# Altium PCB Switch.PcbDoc (part 1 of 2)
Units mm, origin at the board's own origin, x right, y up, seen from the top; angles counter-clockwise.
Board outline 170 x 46 mm, 4 copper layers (SIG, GND1, GND2, PWR/SIG), stack 1.564 mm thick; 45 components, 96 nets, 349 pads, 136 vias.
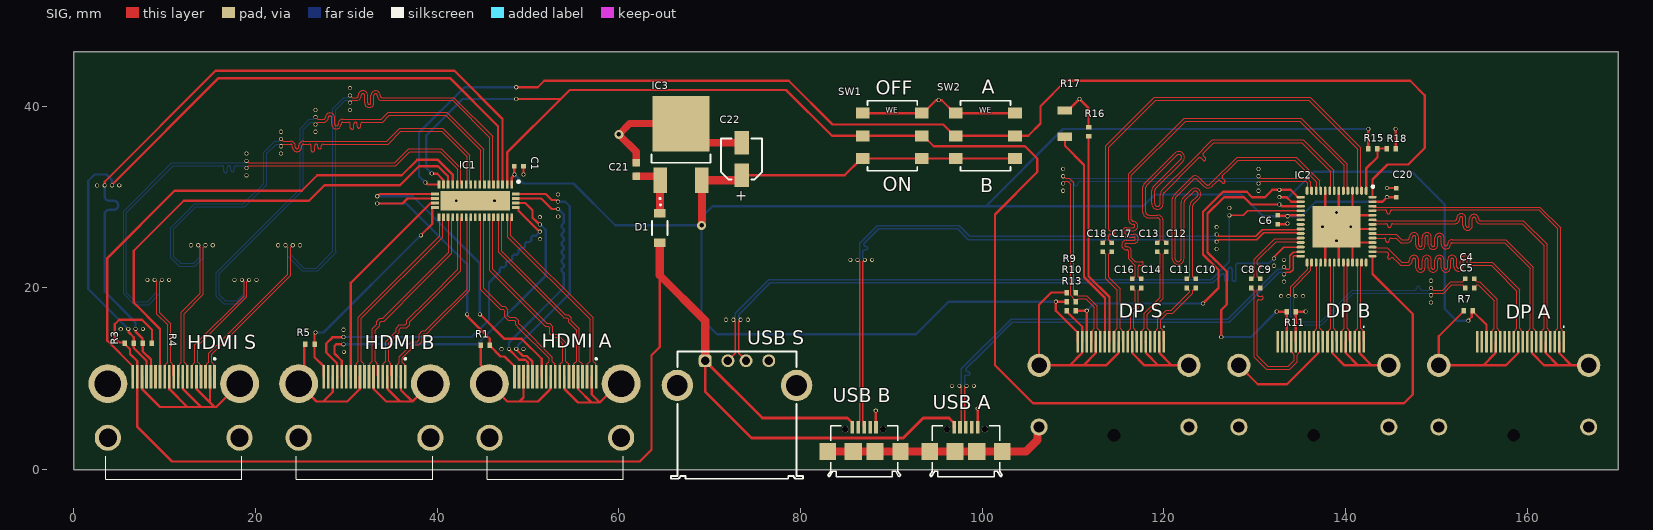
[diagram p0: SIG view]
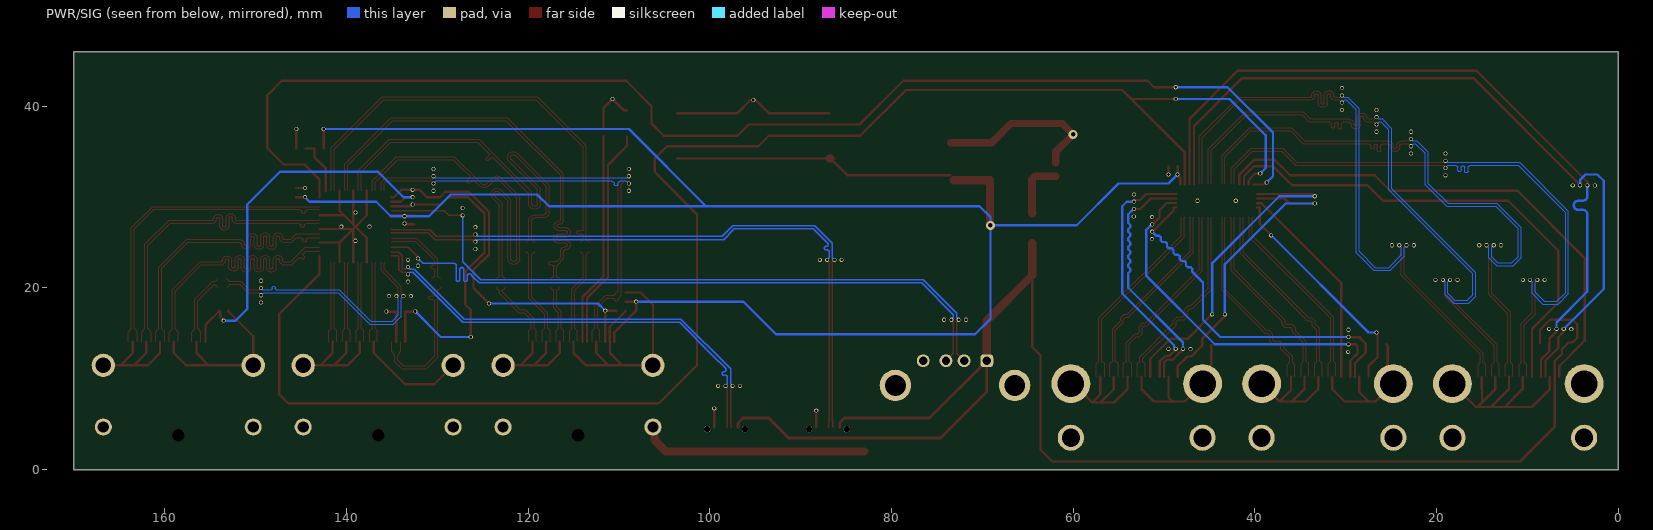
[diagram p1: PWR/SIG view, seen from below]
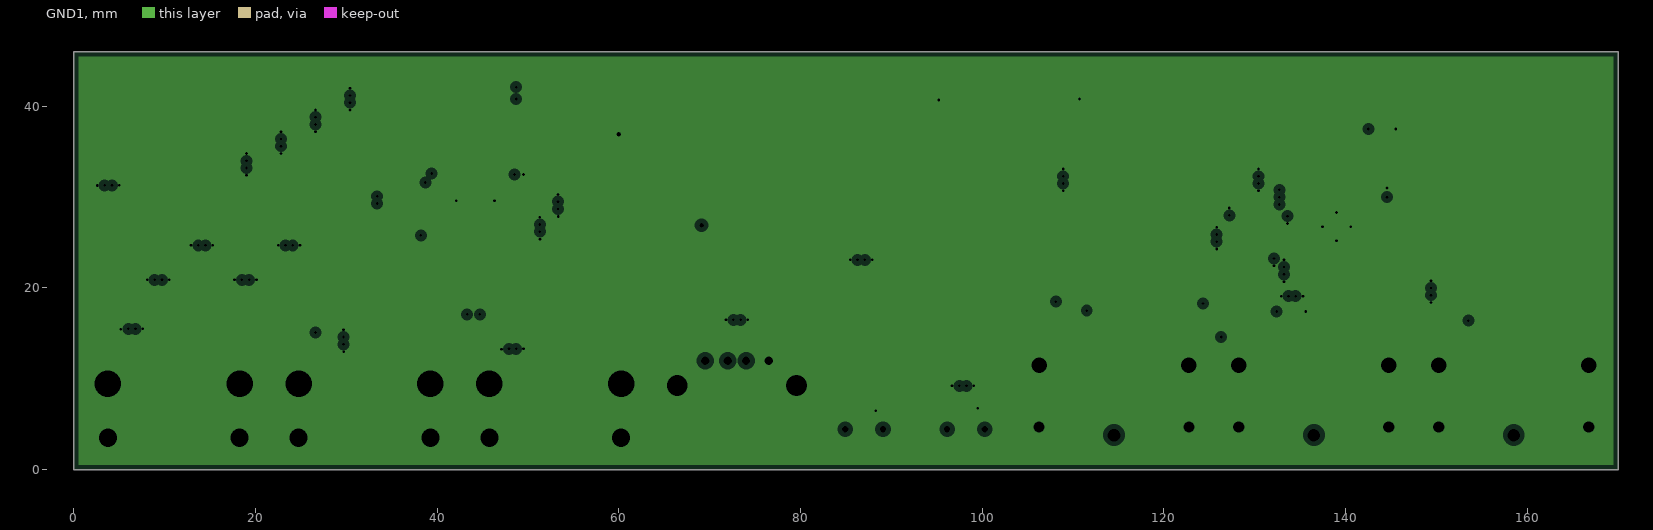
[diagram p2: GND1, clearances drawn from the general rule]
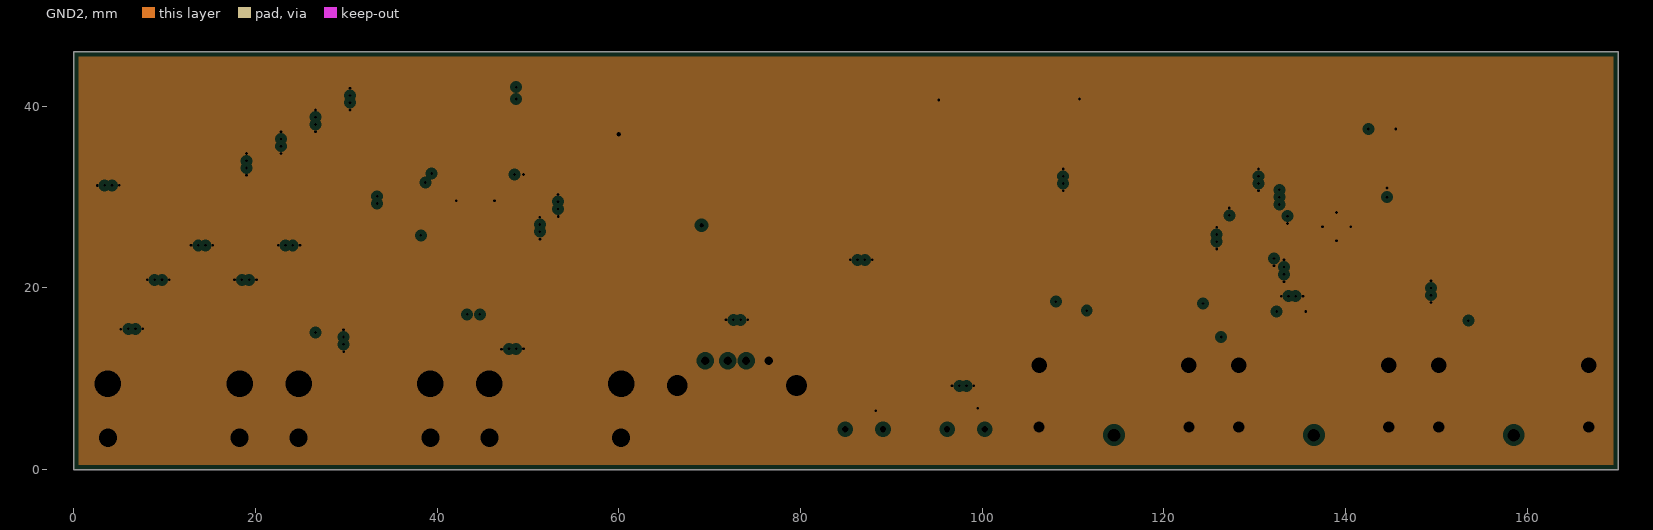
[diagram p3: GND2, clearances drawn from the general rule]

## Layer stack, top to bottom
Top Solder: solder mask 0.0102, Solder Resist, Dk 3.5
SIG: signal copper 0.035
Dielectric 2: prepreg 0.0994, PP-006, Dk 4.1
GND1: plane copper 0.0152, net GND
Dielectric 1: dielectric 1.265, FR-4, Dk 4.8
GND2: plane copper 0.0152, net GND
Dielectric 3: prepreg 0.0994, PP-006, Dk 4.1
PWR/SIG: signal copper 0.035
Bottom Solder: solder mask 0.0102, Solder Resist, Dk 3.5

## Board outline
0,0 0,46 170,46 170,0

## Design rules (kind name [scope] priority, off if disabled: settings)
Clearance [All] p1: gap=0.254 ignorepadtopadclearanceinfootprint=TRUE except(0.15: Arc-Arc Arc-Track Arc-SMDPad Track-Track Track-SMDPad)
DiffPairsRouting USB_DiffPairsRouting [InDifferentialPairClass('USB_Sink') Or InDifferentialPairClass('USB_B') Or InDifferentialPairClass('USB_A')] p1: maxlimit=0.203 minlimit=0.203 mostfreqgap=0.203 toplayer_minwidth=0.155 toplayer_maxwidth=0.155 toplayer_prefwidth=0.155 bottomlayer_minwidth=0.155 bottomlayer_maxwidth=0.155 bottomlayer_prefwidth=0.155 maxuncoupledlength=50
DiffPairsRouting VIDEO_DiffPairsRouting [InDifferentialPairClass('Z100')] p2: maxlimit=0.203 minlimit=0.203 mostfreqgap=0.203 toplayer_minwidth=0.122 toplayer_maxwidth=0.122 toplayer_prefwidth=0.122 bottomlayer_minwidth=0.122 bottomlayer_maxwidth=0.122 bottomlayer_prefwidth=0.122 maxuncoupledlength=8
DiffPairsRouting [All] p3: maxlimit=0.254 minlimit=0.254 mostfreqgap=0.254 toplayer_minwidth=0.381 toplayer_maxwidth=0.381 toplayer_prefwidth=0.381 bottomlayer_minwidth=0.381 bottomlayer_maxwidth=0.381 bottomlayer_prefwidth=0.381 maxuncoupledlength=12.7
HoleSize [All] p1: absolutevalues=TRUE maxlimit=3 minlimit=0.025 maxpercent=80.000 minpercent=20.000
MatchedLengths USB_MatchedLengths [InDifferentialPairClass('USB_Sink') Or InDifferentialPairClass('USB_B') Or InDifferentialPairClass('USB_A')] p1: tolerance=1 checknetsindiffpair=TRUE checkdiffpairvsdiffpair=FALSE checkxsignals=FALSE checkothers=FALSE
MatchedLengths VIDEO_MatchedLengths [InDifferentialPairClass('Z100')] p2: tolerance=1 checknetsindiffpair=TRUE checkdiffpairvsdiffpair=FALSE checkxsignals=FALSE checkothers=FALSE
MinimumSolderMaskSliver [All] p1: minsoldermaskwidth=0.1
PlaneClearance [All] p1: clearance=0.508
PlaneConnect [All] p1: planeconnectstyle=Direct reliefexpansion=0.508 reliefentries=4 reliefconductorwidth=0.254 reliefairgap=0.254
PolygonConnect [All] p1: connectstyle=Relief reliefconductorwidth=0.254 reliefentries=4 polygonreliefangle="90 Angle" airgapwidth=0.254
RoutingVias [All] p1: holewidth=0.3 width=0.45 viastyle="Through Hole" minholewidth=0.3 minwidth=0.4 maxholewidth=0.711 maxwidth=1.27
SilkToSilkClearance [All] p1: silktosilkclearance=0.15
SilkToSolderMaskClearance [IsPad] p1: minsilkscreentomaskgap=0.15 clearancetoexposedcopper=TRUE
SolderMaskExpansion SolderMaskExpansion_1 [InPadClass('All Pads')] p1: expansion=0.05 istentingtop=FALSE
SolderMaskExpansion [All] p2: expansion=0.102 istentingtop=FALSE
SupplyNets "Schematic Supply Nets_2" [InNet('GND')] p1: voltage=0.000
SupplyNets "Schematic Supply Nets_1" [InNet('+3.3')] p2: voltage=0.000
SupplyNets "Schematic Supply Nets" [InNet('+5')] p3: voltage=0.000
Width [All] p1: maxlimit=2 minlimit=0.254 preferedwidth=0.254
23 further rules are at their usual default settings.

## Classes and differential pairs
differential pair class Z100: DP_A_AUX DP_A_AUX_AC DP_A_D0 DP_A_D1 DP_A_D2 DP_A_D3 DP_B_AUX DP_B_AUX_AC DP_B_D0 DP_B_D1 DP_B_D2 DP_B_D3 DP_Sink_AUX DP_Sink_D0 DP_Sink_D0_AC DP_Sink_D1 DP_Sink_D1_AC DP_Sink_D2 DP_Sink_D2_AC DP_Sink_D3 DP_Sink_D3_AC HDMI_A_D0 HDMI_A_D1 HDMI_A_D2 HDMI_A_D3 HDMI_B_D0 HDMI_B_D1 HDMI_B_D2 HDMI_B_D3 HDMI_Sink_D0 HDMI_Sink_D1 HDMI_Sink_D2 HDMI_Sink_D3
differential pair class USB_Sink: Sink_USB
differential pair class USB_B: B_USB
differential pair class USB_A: A_USB
component class USB: C21 C22 D1 IC3 "USB A" "USB B" "USB S"
component class HDMI: C1 "HDMI A" "HDMI B" "HDMI S" IC1 R1 R3 R4 R5
component class DisplayPort: C4 C5 C6 C8 C9 C10 C11 C12 C13 C14 C16 C17 C18 C20 "DP A" "DP B" "DP S" IC2 R7 R9 R10 R11 R13
component class Control: R15 R16 R17 R18 SW1 SW2
differential pair Sink_USB: +Sink_USB_P -Sink_USB_N
differential pair HDMI_Sink_D3: +HDMI_Sink_D3_P -HDMI_Sink_D3_N
differential pair HDMI_Sink_D2: +HDMI_Sink_D2_P -HDMI_Sink_D2_N
differential pair HDMI_Sink_D1: +HDMI_Sink_D1_P -HDMI_Sink_D1_N
differential pair HDMI_Sink_D0: +HDMI_Sink_D0_P -HDMI_Sink_D0_N
differential pair HDMI_B_D3: +HDMI_B_D3_P -HDMI_B_D3_N
differential pair HDMI_B_D2: +HDMI_B_D2_P -HDMI_B_D2_N
differential pair HDMI_B_D1: +HDMI_B_D1_P -HDMI_B_D1_N
differential pair HDMI_B_D0: +HDMI_B_D0_P -HDMI_B_D0_N
differential pair HDMI_A_D3: +HDMI_A_D3_P -HDMI_A_D3_N
differential pair HDMI_A_D2: +HDMI_A_D2_P -HDMI_A_D2_N
differential pair HDMI_A_D1: +HDMI_A_D1_P -HDMI_A_D1_N
differential pair HDMI_A_D0: +HDMI_A_D0_P -HDMI_A_D0_N
differential pair DP_Sink_D3: +DP_Sink_D3_P -DP_Sink_D3_N
differential pair DP_Sink_D3_AC: +DP_Sink_D3_AC_P -DP_Sink_D3_AC_N
differential pair DP_Sink_D2: +DP_Sink_D2_P -DP_Sink_D2_N
differential pair DP_Sink_D2_AC: +DP_Sink_D2_AC_P -DP_Sink_D2_AC_N
differential pair DP_Sink_D1: +DP_Sink_D1_P -DP_Sink_D1_N
differential pair DP_Sink_D1_AC: +DP_Sink_D1_AC_P -DP_Sink_D1_AC_N
differential pair DP_Sink_D0: +DP_Sink_D0_P -DP_Sink_D0_N
differential pair DP_Sink_D0_AC: +DP_Sink_D0_AC_P -DP_Sink_D0_AC_N
differential pair DP_Sink_AUX: +DP_Sink_AUX_P -DP_Sink_AUX_N
differential pair DP_B_D3: +DP_B_D3_P -DP_B_D3_N
differential pair DP_B_D2: +DP_B_D2_P -DP_B_D2_N
differential pair DP_B_D1: +DP_B_D1_P -DP_B_D1_N
differential pair DP_B_D0: +DP_B_D0_P -DP_B_D0_N
differential pair DP_B_AUX: +DP_B_AUX_P -DP_B_AUX_N
differential pair DP_B_AUX_AC: +DP_B_AUX_AC_P -DP_B_AUX_AC_N
differential pair DP_A_D3: +DP_A_D3_P -DP_A_D3_N
differential pair DP_A_D2: +DP_A_D2_P -DP_A_D2_N
differential pair DP_A_D1: +DP_A_D1_P -DP_A_D1_N
differential pair DP_A_D0: +DP_A_D0_P -DP_A_D0_N
differential pair DP_A_AUX: +DP_A_AUX_P -DP_A_AUX_N
differential pair DP_A_AUX_AC: +DP_A_AUX_AC_P -DP_A_AUX_AC_N
differential pair B_USB: +B_USB_P -B_USB_N
differential pair A_USB: +A_USB_P -A_USB_N

## Components (designator, comment, footprint, x,y, rotation, side; value= is the part's Value field where it differs from the comment)
C1 "885012205037" WCAP-CSGP_0402_L1W0.5H0.5 49,33.4 r0 top
C4 "885012205037" WCAP-CSGP_0402_L1W0.5H0.5 153.65,21 r180 top
C5 "885012205037" WCAP-CSGP_0402_L1W0.5H0.5 153.65,20 r180 top
C6 "885012205037" WCAP-CSGP_0402_L1W0.5H0.5 132.5,27.5 r270 top
C8 "885012205037" WCAP-CSGP_0402_L1W0.5H0.5 129.6,20.5 r90 top
C9 "885012205037" WCAP-CSGP_0402_L1W0.5H0.5 130.6,20.5 r90 top
C10 "885012205037" WCAP-CSGP_0402_L1W0.5H0.5 123.5,20.5 r270 top
C11 "885012205037" WCAP-CSGP_0402_L1W0.5H0.5 122.5,20.5 r270 top
C12 "885012205037" WCAP-CSGP_0402_L1W0.5H0.5 120.25,24.5 r270 top
C13 "885012205037" WCAP-CSGP_0402_L1W0.5H0.5 119.25,24.5 r270 top
C14 "885012205037" WCAP-CSGP_0402_L1W0.5H0.5 117.5,20.5 r270 top
C16 "885012205037" WCAP-CSGP_0402_L1W0.5H0.5 116.5,20.5 r270 top
C17 "885012205037" WCAP-CSGP_0402_L1W0.5H0.5 114.25,24.5 r270 top
C18 "885012205037" WCAP-CSGP_0402_L1W0.5H0.5 113.25,24.5 r270 top
C20 "885012205037" WCAP-CSGP_0402_L1W0.5H0.5 145.55,30.5 r270 top
C21 "885012206023" WCAP-CSGP_0603_L1.6W0.8H0.8_Reflow 61.9,33.05 r90 top
C22 "865080340001" WCAP-ASLI_D4H5.5 1343.5,-1235.8 r270 top
D1 "BAT54GWJ" SOD123 64.5,26.6 r270 top
"DP A" "0472720001" 0472720001 158.5,6.68 r0 top
"DP B" "0472720001" 0472720001 136.5,6.68 r0 top
"DP S" "0472720001" 0472720001 114.5,6.68 r0 top
"HDMI A" "208658-1051" 2086581051 53,5 r0 top locked
"HDMI B" "208658-1051" 2086581051 32,5 r0 top locked
"HDMI S" "208658-1051" 2086581051 11,5 r0 top locked
IC1 "TS3DV642A0RUAR" QFN50P350X900X80-43N-D 44.2,29.6 r270 top locked
IC2 "HD3SS215RTQR" QFN50P800X800X100-57N-D 139,26.75 r270 top
IC3 "LD29150DT33R" ST_DPAK_1 66.85,39.88 r0 top
R1 "100000Ohm, 100mW" WRIS-RSKS_0402 45.3,13.7 r0 top
R3 "47000Ohm, 100mW" WRIS-RSKS_0402 6.1,13.9 r180 top
R4 "47000Ohm, 100mW" WRIS-RSKS_0402 8.1,13.9 r0 top
R5 "100000Ohm, 100mW" WRIS-RSKS_0402 26,13.8 r0 top
R7 "100000Ohm, 100mW" WRIS-RSKS_0402 153.5,17.5 r0 top
R9 "100000Ohm, 100mW" WRIS-RSKS_0402 109.775,19.5 r180 top
R10 "100000Ohm, 100mW" WRIS-RSKS_0402 109.775,18.5 r180 top
R11 "100000Ohm, 100mW" WRIS-RSKS_0402 134,17.4 r180 top
R13 "100000Ohm, 100mW" WRIS-RSKS_0402 109.775,17.5 r0 top
R15 "10000Ohm, 100mW" WRIS-RSKS_0402 143,35.35 r180 top
R16 "1000000Ohm, 100mW" WRIS-RSKS_0402 111.7,37.2 r270 top
R17 "4700000Ohm, 250mW" WRIS-RSKS_1206_Reflow 109.1,38.1 r270 top
R18 "10000Ohm, 100mW" WRIS-RSKS_0402 145,35.35 r180 top
SW1 "452403012014" 452403012014 -1179.9,1306.75 r90 top
SW2 "452403012014" 452403012014 -1169.65,1306.75 r90 top
"USB A" "629105136821" 629105136821 98.2,2 r0 top
"USB B" "629105136821" 629105136821 87,2 r0 top
"USB S" "61400416021" 61400416021 73,6 r0 top

## Footprints (in the part's own frame and the unit in brackets; to place one, negate y for a bottom-side part, rotate by r counter-clockwise, add the part's x,y. Pads: shape width x height; smd on the part's side, far side on the other; paste and mask are expansions set on the pad)
0472720001 [mm]
  rect 0.28x2.4 smd: 1(5.5,7.4) 2(5,7.4) 3(4.5,7.4) 4(4,7.4) 5(3.5,7.4) 6(3,7.4) 7(2.5,7.4) 8(2,7.4) 9(1.5,7.4) 10(1,7.4) 11(0.5,7.4) 12(0,7.4) 13(-0.5,7.4) 14(-1,7.4) 15(-1.5,7.4) 16(-2,7.4) 17(-2.5,7.4) 18(-3,7.4) 19(-3.5,7.4) 20(-4,7.4)
  round 2.565 hole 1.71: MH1(8.25,4.8) MH2(-8.25,4.8)
  round 1.875 hole 1.25: MH3(8.25,-1.98) MH4(-8.25,-1.98)
  round 0.7 hole 1.4 unplated: MH5(0,-2.88)
  silkscreen extent 5.45,9 5.55,9.1, body extent -8.9,-7.13 8.89,7.76, height 6.63
2086581051 [mm]
  rect 0.3x2.6 smd: 1(4.5,5.235) 2(4,5.235) 3(3.5,5.235) 4(3,5.235) 5(2.5,5.235) 6(2,5.235) 7(1.5,5.235) 8(1,5.235) 9(0.5,5.235) 10(0,5.235) 11(-0.5,5.235) 12(-1,5.235) 13(-1.5,5.235) 14(-2,5.235) 15(-2.5,5.235) 16(-3,5.235) 17(-3.5,5.235) 18(-4,5.235) 19(-4.5,5.235)
  round 4.275 hole 2.909: MH1(-7.25,4.475) MH2(7.25,4.475)
  round 2.88 hole 1.992: MH3(-7.25,-1.485) MH4(7.25,-1.485)
  silkscreen extent -7.5,-6.07 7.5,7.3, body extent -7.5,-5.99 7.5,6.16, height 6.18
61400416021 [mm] "USB 2.0 Type A Horizontal"
  rrect50% 1.42x1.42 hole 0.92: 1(-3.5,5.99)
  round 1.42 hole 0.92: 2(-1,5.99) 3(1,5.99) 4(3.5,5.99)
  round 3.45 hole 2.3: Shell(-6.57,3.28) Shell(6.57,3.28)
  silkscreen extent -7.25,-7 7.25,7, body extent -8,-7 8,7, height 7.63
452403012014 [mm] "SMT Mini Slide Switch, Same Side Connection"
  rect 1.2x1.5 smd: 1(-1272.5,-1266.75) 2(-1270,-1266.75) 3(-1267.5,-1266.75) 4(-1272.5,-1273.25) 5(-1270,-1273.25) 6(-1267.5,-1273.25)
  silkscreen extent -1273.85,-1272.75 -1266.15,-1267.25, body extent -1273.85,-1273.75 -1266.15,-1266.25, height 3.48
629105136821 [mm] "Micro USB 2.0 SMT Type B Horizontal 5 Contacts"
  rect 0.4x1.35 smd: 1(-1.3,2.675) 2(-0.65,2.675) 3(0,2.675) 4(0.65,2.675) 5(1.3,2.675)
  round 0.7 hole 0.7 unplated: MH1(-2.075,2.45) MH2(2.075,2.45)
  rect 1.8x1.9 smd: Shell(-4,0) Shell(4,0)
  rect 1.9x1.9 smd: Shell(-1.2,0) Shell(1.2,0)
  silkscreen extent -4,-2.75 4,2.85, body extent -4,-2.73 4,3.17, height 2.69
QFN50P350X900X80-43N-D [mm]
  rect 0.85x0.3 smd: 1(-1.8,4) 2(-1.8,3.5) 3(-1.8,3) 4(-1.8,2.5) 5(-1.8,2) 6(-1.8,1.5) 7(-1.8,1) 8(-1.8,0.5) 9(-1.8,0) 10(-1.8,-0.5) 11(-1.8,-1) 12(-1.8,-1.5) 13(-1.8,-2) 14(-1.8,-2.5) 15(-1.8,-3) 16(-1.8,-3.5) 17(-1.8,-4) 22(1.8,-4) 23(1.8,-3.5) 24(1.8,-3) 25(1.8,-2.5) 26(1.8,-2) 27(1.8,-1.5) 28(1.8,-1) 29(1.8,-0.5) 30(1.8,0) 31(1.8,0.5) 32(1.8,1) 33(1.8,1.5) 34(1.8,2) 35(1.8,2.5) 36(1.8,3) 37(1.8,3.5) 38(1.8,4)
  rect 0.3x0.85 smd: 18(-0.75,-4.45) 19(-0.25,-4.45) 20(0.25,-4.45) 21(0.75,-4.45) 39(0.75,4.45) 40(0.25,4.45) 41(-0.25,4.45) 42(-0.75,4.45)
  rect 2.15x7.65 smd: 43(0,0)
  silkscreen extent -2.22,4.63 -1.98,4.88, body extent -1.75,-4.5 1.75,4.5, height 0.8
QFN50P800X800X100-57N-D [mm]
  oval 0.9x0.3 smd: 1(-3.95,3.25) 2(-3.95,2.75) 3(-3.95,2.25) 4(-3.95,1.75) 5(-3.95,1.25) 6(-3.95,0.75) 7(-3.95,0.25) 8(-3.95,-0.25) 9(-3.95,-0.75) 10(-3.95,-1.25) 11(-3.95,-1.75) 12(-3.95,-2.25) 13(-3.95,-2.75) 14(-3.95,-3.25) 29(3.95,-3.25) 30(3.95,-2.75) 31(3.95,-2.25) 32(3.95,-1.75) 33(3.95,-1.25) 34(3.95,-0.75) 35(3.95,-0.25) 36(3.95,0.25) 37(3.95,0.75) 38(3.95,1.25) 39(3.95,1.75) 40(3.95,2.25) 41(3.95,2.75) 42(3.95,3.25)
  oval 0.3x0.9 smd: 15(-3.25,-3.95) 16(-2.75,-3.95) 17(-2.25,-3.95) 18(-1.75,-3.95) 19(-1.25,-3.95) 20(-0.75,-3.95) 21(-0.25,-3.95) 22(0.25,-3.95) 23(0.75,-3.95) 24(1.25,-3.95) 25(1.75,-3.95) 26(2.25,-3.95) 27(2.75,-3.95) 28(3.25,-3.95) 43(3.25,3.95) 44(2.75,3.95) 45(2.25,3.95) 46(1.75,3.95) 47(1.25,3.95) 48(0.75,3.95) 49(0.25,3.95) 50(-0.25,3.95) 51(-0.75,3.95) 52(-1.25,3.95) 53(-1.75,3.95) 54(-2.25,3.95) 55(-2.75,3.95) 56(-3.25,3.95)
  rect 4.6x5.3 smd: 57(0,0)
  silkscreen extent -4.52,3.88 -4.28,4.13, body extent -4,-4 4,4, height 1
SOD123 [mm]
  rect 0.91x1.22 smd: 1(-1.635,0) 2(1.635,0)
  silkscreen extent -2.59,-0.85 0.8,0.85, body extent -1.82,-0.8 1.78,0.8, height 1.2
ST_DPAK_1 [mm]
  rect 1.5x2.8 smd: 1(-2.286,-8.03) 2(2.286,-8.03)
  rect 6.3x6.1 smd: 3(0,-1.78)
  silkscreen extent -3.25,-10.12 3.25,-5.18, body extent -3.25,-9.15 3.25,0.26, height 2.33
WCAP-ASLI_D4H5.5 [mm] "Aluminium Electrolytic V-Chip SMT Capacitors, 4x5.5mm"
  rect 2.6x1.6 smd: 1(-1268.2,-1270) 2(-1271.8,-1270)
  silkscreen extent -1272.25,-1272.25 -1267.75,-1267.75, body extent -1272.5,-1272.15 -1267.5,-1267.85, height 5.5
WCAP-CSGP_0402_L1W0.5H0.5 [mm] "Ceramic Capacitors, body 1x0.5mm"
  rect 0.5x0.5 smd: 1(-0.5,0) 2(0.5,0)
  body extent -0.5,-0.25 0.5,0.25, height 0.5
WCAP-CSGP_0603_L1.6W0.8H0.8_Reflow [mm] "Ceramic Capacitors, body 1.6x0.8mm"
  rect 0.8x0.8 smd: 1(-0.75,0) 2(0.75,0)
  body extent -0.8,-0.4 0.8,0.4, height 0.8
WRIS-RSKS_0402 [mm] "Fixed Thick Film, body 1.00 x 0.50 mm"
  rect 0.5x0.6 smd: 1(-0.5,0) 2(0.5,0)
  body extent -0.5,-0.25 0.5,0.25, height 0.35
WRIS-RSKS_1206_Reflow [mm] "Fixed Thick Film, body 3.10 x 1.60 mm"
  rect 0.9x1.6 smd: 1(-1.45,0) 2(1.45,0)
  body extent -1.55,-0.8 1.55,0.8, height 0.6

## Part data
C1 C4 C5 C6 C8 C9 C10 C11 C12 C13 C14 C16 C17 C18 C20: library part CMP-207839-000001-2, "CAP CER 0.1UF 16V X7R 0402", Capacitance=100nF, Case Code (Imperial)=0402, Case Code (Metric)=1005, Dielectric=X7R, Insulation Resistance=5GΩ, Max Operating Temperature=125°C, Min Operating Temperature=-55°C, Tolerance=10%, Voltage Rating=16V, Case/Package=0402, Height=500µm, Length=1mm, Material=Ceramic, Mount="Surface Mount", NexarPartId=53703175, Packaging="Tape & Reel (TR)", REACH SVHC=Unknown, RoHS=Compliant, Thickness=558.8µm, Voltage Rating (DC)=16V, Width=500µm
C21: library part CMP-03913-53914732-1, "885012206023 Ceramic Capacitor 330nF, 10VDC, 0603, ±10 %", Capacitance=330nF, Case Code (Imperial)=0603, Case Code (Metric)=1608, Dielectric=X7R, Insulation Resistance=1.5GΩ, Max Operating Temperature=125°C, Min Operating Temperature=-55°C, Tolerance=10%, Voltage Rating=10V, Case/Package=0603, Height=800µm, Length=1.6mm, Mount="Surface Mount", NexarPartId=53914732, Packaging="Tape & Reel (TR)", RoHS=Compliant, Thickness=939.8µm, Voltage Rating (DC)=10V, Width=800µm
C22: library part CMP-03913-53914566-1, "865080340001 WCAP-ASLI Aluminum Electrolytic Capacitors", Capacitance=10µF, Case/Package=Radial, ESR (Equivalent Series Resistance)=1.66693Ω, Insulation Resistance=5.33333MΩ, Leakage Current=3µA, Max Operating Temperature=105°C, Min Operating Temperature=-55°C, Ripple Current=80mA, Tolerance=20%, Voltage Rating=16V, Diameter=4mm, Height=5.5mm, Height - Seated (Max)=5.5118mm, Impedance=2.2Ω, Lead Free="Lead Free", Length=5.5mm, Life (Hours)=2000hours, Mount="Surface Mount", NexarPartId=53914566, Packaging="Tape & Reel (TR)", Polarity=Polar, REACH SVHC=Unknown, Ripple Current (AC)=80mA, RoHS=Compliant, Voltage Rating (DC)=16V, Width=4.3mm
D1: "Schottky Diode", Manufacturer_Name=Nexperia, Mouser Part Number=841-BAT54GWJ, Arrow Part Number=BAT54GWJ, Arrow Price/Stock=https://www.arrow.com/en/products/bat54gwj/nexperia?region=europe, Datasheet Link=https://assets.nexperia.com/documents/data-sheet/BAT54GW.pdf, Manufacturer_Part_Number=BAT54GWJ, Mouser Price/Stock=https://www.mouser.co.uk/ProductDetail/Nexperia/BAT54GWJ?qs=EO%252B2iqeaG03qzVr9l4ml1Q%3D%3D
"DP A" "DP B" "DP S": "Connector", Manufacturer_Name=Molex, Mouser Part Number=N/A, Arrow Part Number=0472720001, Arrow Price/Stock=https://www.arrow.com/en/products/0472720001/molex?region=europe, Datasheet Link=http://www.molex.com/pdm_docs/sd/472720001_sd.pdf, Height=6.9mm, Manufacturer_Part_Number=0472720001, Mouser Price/Stock=https://www.mouser.co.uk/ProductDetail/Molex/0472720001?qs=PBcRNPEHKsrarbeLf7n8sg%3D%3D
"HDMI A" "HDMI B" "HDMI S": "Connector", Manufacturer_Name=Molex, Mouser Part Number=538-208658-1051, Arrow Part Number=208658-1051, Arrow Price/Stock=https://www.arrow.com/en/products/2086581051/molex?region=nac, Height=6.44mm, Manufacturer_Part_Number=208658-1051, Mouser Price/Stock=https://www.mouser.co.uk/ProductDetail/Molex/208658-1051?qs=BJlw7L4Cy7%252Bu27sIkZU3Xw%3D%3D
IC1: "Integrated Circuit", Manufacturer_Name="Texas Instruments", Mouser Part Number=595-TS3DV642A0RUAR, Arrow Part Number=TS3DV642A0RUAR, Arrow Price/Stock=https://www.arrow.com/en/products/ts3dv642a0ruar/texas-instruments?region=nac, Datasheet Link=http://www.ti.com/lit/gpn/ts3dv642, Height=0.8mm, Manufacturer_Part_Number=TS3DV642A0RUAR, Mouser Price/Stock=https://www.mouser.co.uk/ProductDetail/Texas-Instruments/TS3DV642A0RUAR?qs=zjX5mX%252BjEMCTQjtLUY3z%2FA%3D%3D
IC2: "Integrated Circuit", Manufacturer_Name="Texas Instruments", Mouser Part Number=595-HD3SS215RTQR, Arrow Part Number=HD3SS215RTQR, Arrow Price/Stock=https://www.arrow.com/en/products/hd3ss215rtqr/texas-instruments?region=nac, Datasheet Link=http://www.ti.com/lit/gpn/hd3ss215, Height=1mm, Manufacturer_Part_Number=HD3SS215RTQR, Mouser Price/Stock=https://www.mouser.co.uk/ProductDetail/Texas-Instruments/HD3SS215RTQR?qs=7z%252BmIopC6%2FI%2F794hSmEgIA%3D%3D
IC3: "Integrated Circuit", Manufacturer_Name=STMicroelectronics, Mouser Part Number=511-LD29150DT33R, Arrow Part Number=LD29150DT33R, Arrow Price/Stock=https://www.arrow.com/en/products/ld29150dt33r/stmicroelectronics?region=nac, Datasheet Link=http://www.st.com/web/en/resource/technical/document/datasheet/CD00003403.pdf, Manufacturer_Part_Number=LD29150DT33R, Mouser Price/Stock=https://www.mouser.co.uk/ProductDetail/STMicroelectronics/LD29150DT33R?qs=M4RLcaOHglr1iYLz8rxZ4g%3D%3D
R1 R5 R7 R9 R10 R11 R13: library part 560112110019, "WRIS-RSKS Thick Film Resistor, size 0402, 100000Ohm, 100mW", Case/Size Code=0402, Limiting Element Voltage=50V, Manufacturer="Wurth Elektronik", Operating Temperature Max=155°C, Operating Temperature Min=-55°C, Rated Power=100mW, Resistance=100000Ohm, Resistance Tolerance=+/-1%, Temperature Coefficient of Resistance Max=100ppm/°C, Temperature Coefficient of Resistance Min=-100ppm/°C, Category="Thick Film Resistors", ComponentLink1Description="Website Link", ComponentLink1URL=https://www.we-online.com/redexpert/article/560112110019?ad, ComponentLink2Description="Datasheet Link", ComponentLink2URL=https://www.we-online.com/redexpert/spec/560112110019?ad, Height=0.35mm, Length=1mm, Manufacturer Part Number=560112110019, Match Code=WRIS-RSKS, Mount="Surface Mount", Packaging="Tape and Reel", Width=0.5mm
R3 R4: library part 560112110055, "WRIS-RSKS Thick Film Resistor, size 0402, 47000Ohm, 100mW", Case/Size Code=0402, Limiting Element Voltage=50V, Manufacturer="Wurth Elektronik", Operating Temperature Max=155°C, Operating Temperature Min=-55°C, Rated Power=100mW, Resistance=47000Ohm, Resistance Tolerance=+/-1%, Temperature Coefficient of Resistance Max=100ppm/°C, Temperature Coefficient of Resistance Min=-100ppm/°C, Category="Thick Film Resistors", ComponentLink1Description="Website Link", ComponentLink1URL=https://www.we-online.com/redexpert/article/560112110055?ad, ComponentLink2Description="Datasheet Link", ComponentLink2URL=https://www.we-online.com/redexpert/spec/560112110055?ad, Height=0.35mm, Length=1mm, Manufacturer Part Number=560112110055, Match Code=WRIS-RSKS, Mount="Surface Mount", Packaging="Tape and Reel", Width=0.5mm
R15 R18: library part 560112110020, "WRIS-RSKS Thick Film Resistor, size 0402, 10000Ohm, 100mW", Case/Size Code=0402, Limiting Element Voltage=50V, Manufacturer="Wurth Elektronik", Operating Temperature Max=155°C, Operating Temperature Min=-55°C, Rated Power=100mW, Resistance=10000Ohm, Resistance Tolerance=+/-1%, Temperature Coefficient of Resistance Max=100ppm/°C, Temperature Coefficient of Resistance Min=-100ppm/°C, Category="Thick Film Resistors", ComponentLink1Description="Website Link", ComponentLink1URL=https://www.we-online.com/redexpert/article/560112110020?ad, ComponentLink2Description="Datasheet Link", ComponentLink2URL=https://www.we-online.com/redexpert/spec/560112110020?ad, Height=0.35mm, Length=1mm, Manufacturer Part Number=560112110020, Match Code=WRIS-RSKS, Mount="Surface Mount", Packaging="Tape and Reel", Width=0.5mm
R16: library part 560112110033, "WRIS-RSKS Thick Film Resistor, size 0402, 1000000Ohm, 100mW", Case/Size Code=0402, Limiting Element Voltage=50V, Manufacturer="Wurth Elektronik", Operating Temperature Max=155°C, Operating Temperature Min=-55°C, Rated Power=100mW, Resistance=1000000Ohm, Resistance Tolerance=+/-1%, Temperature Coefficient of Resistance Max=100ppm/°C, Temperature Coefficient of Resistance Min=-100ppm/°C, Category="Thick Film Resistors", ComponentLink1Description="Website Link", ComponentLink1URL=https://www.we-online.com/redexpert/article/560112110033?ad, ComponentLink2Description="Datasheet Link", ComponentLink2URL=https://www.we-online.com/redexpert/spec/560112110033?ad, Height=0.35mm, Length=1mm, Manufacturer Part Number=560112110033, Match Code=WRIS-RSKS, Mount="Surface Mount", Packaging="Tape and Reel", Width=0.5mm
R17: library part 560112132029, "WRIS-RSKS Thick Film Resistor, size 1206, 4700000Ohm, 250mW", Case/Size Code=1206, Limiting Element Voltage=200V, Manufacturer="Wurth Elektronik", Operating Temperature Max=155°C, Operating Temperature Min=-55°C, Rated Power=250mW, Resistance=4700000Ohm, Resistance Tolerance=+/-1%, Temperature Coefficient of Resistance Max=200ppm/°C, Temperature Coefficient of Resistance Min=-200ppm/°C, Category="Thick Film Resistors", ComponentLink1Description="Website Link", ComponentLink1URL=https://www.we-online.com/redexpert/article/560112132029?ad, ComponentLink2Description="Datasheet Link", ComponentLink2URL=https://www.we-online.com/redexpert/spec/560112132029?ad, Height=0.6mm, Length=3.1mm, Manufacturer Part Number=560112132029, Match Code=WRIS-RSKS, Mount="Surface Mount", Packaging="Tape and Reel", Width=1.6mm
SW1 SW2: library part CMP-03913-71472420-1, "452403012014 Slide Switch, Dpdt, 0.3A, 6Vdc, Smd Rohs Compliant: Yes", Color=Silver, Current Rating=300mA, Insulation Resistance=100MΩ, Max Operating Temperature=85°C, Min Operating Temperature=-40°C, Voltage Rating=6V, Actuator Length=1.2mm, Actuator Material="Liquid Crystal Polymer, Polymer", Contact Plating=Silver, Contact Style=Non-Shorting, Mount="Surface Mount", NexarPartId=71472420, Packaging="Tape and Reel", RoHS=Compliant, Switch Function=On-On, Switch Travel=2mm, Termination=SMD/SMT, Throw Configuration=DPDT, Voltage Rating (DC)=6V
"USB A" "USB B": library part CMP-1502-03253-2, Color=Black, Contact Resistance=30mΩ, Current Rating=1A, Flammability Rating="UL94 V-0", Insulation Resistance=1GΩ, Max Operating Temperature=105°C, Min Operating Temperature=-40°C, Operating Supply Voltage=30V, Connector Type=USB, Contact Material=Copper, Contact Plating=Gold, Gender=Receptacle, Height=2.9mm, Lead Free="Lead Free", Length=5.9mm, Mount="Horizontal, Surface Mount", NexarPartId=19991173, Number of Contacts=5, Number of Pins=5, Number of Ports=1, Number of Positions=5, Orientation=Horizontal, Packaging="Tape and Reel", Plating=Nickel, REACH SVHC=Unknown, RoHS=Compliant, Termination=Solder, USB Standard="USB 2.0", Voltage Rating=30V
"USB S": library part CMP-1502-03227-2, Color=White, Contact Resistance=20mΩ, Current Rating=1.5A, Flammability Rating="UL94 V-0", Insulation Resistance=1GΩ, Max Operating Temperature=105°C, Min Operating Temperature=-40°C, Operating Supply Voltage=30V, Connector Type=USB, Contact Material=Copper, Contact Plating=Gold, Gender=Receptacle, Insulation Material=PBT, Lead Free="Lead Free", Length=15.8mm, Mount="Horizontal, Through Hole", NexarPartId=21041530, Number of Contacts=4, Number of Pins=4, Number of Ports=1, Number of Positions=4, Orientation=Horizontal, REACH SVHC=Unknown, RoHS=Compliant, Termination=Solder, USB Standard="USB 2.0", Voltage Rating=30V, Voltage Rating (DC)=30V, Width=14.4mm

## Via types
v1: diameter 0.45, hole 0.3, SIG to PWR/SIG, 134 vias
v2: diameter 1, hole 0.5, SIG to PWR/SIG, 2 vias

## Nets (pads, with @x,y where several pads share a name; then routed paths per layer and width w, separated by ;. In a path a pad name is that pad's centre, name@x,y a point inside that pad or via, vN(x,y) a via of type N, cw(c..) or ccw(c..) an arc to the next point about the centre after c; other vN are vias at no path point)
+3.3: "DP S.20" C1.1 C6.1 C20.2 C22.1 IC1.1 IC2.19 IC2.55 IC3.2 R10.2 R15.2 SW1.1 SW1.4 SW2.1 SW2.4 | length 255.3
  SIG w0.254: IC1.1@48.2,31.4 48.223,31.423 48.223,32.17 48.5,32.447 v1(48.5,32.5) C1.1@48.5,33.4 ; C22.1@73.5,32.4 84.85,32.4 SW1.1@86.7,34.25 ; SW1.1@86.85,34.25 SW1.4@93.35,34.25 SW2.1@97.1,34.25 SW2.4@103.6,34.25 ; R10.2@109.275,18.5 v1(108.1,18.5) 108.1,17.5 110.447,15.153 110.487,15.153 110.5,15.14 110.5,14.08 ; C6.1@132.5,28 132.563,27.938 133.562,27.938 v1(133.6,27.9) ; v1@133.753,28 IC2.19@135.05,28 ; R15.2@142.5,35.35 v1(142.5,37.5) ; IC2.55@142.95,29.5 144.05,29.5 v1(144.55,30) C20.2@145.55,30
  SIG w0.9: v2(69.1,26.9) 69.1,26.927 69.136,26.963 IC3.2@69.136,31.85 C22.1@73.15,31.85 ; SW1.1@86.7,34.25 SW1.1@86.85,34.25
  PWR/SIG w0.254: v1(48.5,32.5) 49.5,31.5 55,31.5 59.6,26.9 v2(69.1,26.9) ; v1(108.1,18.5) 96.3,18.5 92.7,14.9 70.8,14.9 69.1,16.6 v2(69.1,26.9) ; v1(142.5,37.5) 108.9,37.5 100.4,29 ; v1(144.55,30) 144.05,29.5 136.7,29.5 135.1,27.9 v1(133.6,27.9) 130.9,27.9 128.5,30.3 119,30.3 117.7,29 100.4,29 ; v2(69.1,26.9) 69.1,27.8 70.3,29 100.4,29
+5: "HDMI S.18" "USB A.1" "USB B.1" "USB S.1" D1.2 R3.2 R4.2 | length 166.2
  SIG w0.254: R4.2@8.6,13.9 8.6,15.4 7.5,16.5 5,16.5 4.5,16 4.5,14.5 5,14 5.5,14 R3.2@5.6,13.9 5.6,13.85 6.196,13.254 6.196,12.733 7,11.929 7,10.235 7,4.7 10.8,0.9 62.3,0.9 63.6,2.2 63.6,12.6 64.5,13.5 64.5,21.4
  SIG w0.3: 85.7,4.675 85.7,5.15 85.15,5.7 75.79,5.7 69.5,11.99 69.5,8.6 74.6,3.5 91.3,3.5 93.5,5.7 96.35,5.7 96.9,5.15 96.9,4.675
  SIG w0.9: D1.2@64.5,24.965 64.5,21.4 69.5,16.4 69.5,11.99
A_USB_N: "USB A.3" IC2.28 | length 50.4
  SIG w0.155: 98.2,4.675 98.078,4.797 98.078,5.34 98.054,5.363 98.054,6.984 98.054,8.994 98.275,9.215 v1(98.275,9.232) ; v1(133.2,21.5) 133.218,21.5 133.438,21.721 133.915,21.721 134.216,22.022 134.216,23.42 134.367,23.571 134.979,23.571 IC2.28@135.05,23.5
  PWR/SIG w0.155: v1(98.275,9.232) 98.275,9.25 98.054,9.471 98.054,9.7 98.054,10.187 cw(c98.259,10.187) 98.259,10.392 98.419,10.392 ccw(c98.419,10.597) 98.623,10.597 ccw(c98.419,10.597) 98.419,10.801 98.395,10.801 cw(c98.395,11.006) 98.251,11.151 99.7,12.6 103.325,16.225 127.169,16.225 132.665,21.721 132.962,21.721 133.182,21.5 v1(133.2,21.5)
A_USB_P: "USB A.2" IC2.27 | length 50.4
  SIG w0.155: v1(97.475,9.232) 97.475,9.215 97.696,8.994 97.696,7.133 97.696,5.363 97.672,5.34 97.672,4.797 97.55,4.675 ; v1(133.2,22.3) 133.218,22.3 133.438,22.079 133.767,22.079 133.858,22.17 133.858,23.569 134.218,23.929 134.979,23.929 IC2.27@135.05,24
  PWR/SIG w0.155: v1(97.475,9.232) 97.475,9.25 97.696,9.471 97.696,11.103 103.176,16.584 127.021,16.584 132.517,22.079 132.962,22.079 133.182,22.3 v1(133.2,22.3)
B_USB_N: "USB B.3" IC2.23 | length 70.8
  SIG w0.155: 87,4.675 86.878,4.797 86.878,5.34 86.854,5.363 86.854,13.918 86.854,22.862 87.075,23.082 v1(87.075,23.1) ; v1(125.8,25.1) 125.818,25.1 126.038,25.321 130.229,25.321 130.979,26.071 134.979,26.071 IC2.23@135.05,26
  PWR/SIG w0.155: v1(87.075,23.1) 87.075,23.118 86.854,23.338 86.854,23.492 86.854,23.979 cw(c87.059,23.979) 87.059,24.184 87.174,24.184 ccw(c87.174,24.389) 87.379,24.389 ccw(c87.174,24.389) 87.174,24.593 87.163,24.593 cw(c87.163,24.798) 87.018,24.943 88.558,26.483 88.575,26.5 97.3,26.5 98.479,25.321 125.562,25.321 125.782,25.1 v1(125.8,25.1)
B_USB_P: "USB B.2" IC2.22 | length 70.9
  SIG w0.155: v1(86.275,23.1) 86.275,23.082 86.496,22.862 86.496,14.067 86.496,5.363 86.472,5.34 86.472,4.797 86.35,4.675 ; v1(125.8,25.9) 125.818,25.9 126.038,25.679 130.081,25.679 130.831,26.429 134.979,26.429 IC2.22@135.05,26.5
  PWR/SIG w0.155: v1(86.275,23.1) 86.275,23.118 86.496,23.338 86.496,24.928 88.426,26.859 97.449,26.859 98.628,25.679 125.562,25.679 125.782,25.9 v1(125.8,25.9)
CHANNEL_SELECT: IC1.17 IC2.56 SW2.2 SW2.5 | length 142.2
  SIG w0.254: v1(38.7,31.6) 38.753,31.6 38.953,31.4 IC1.17@40.2,31.4 ; v1(48.7,42.1) 51.077,42.1 51.777,42.8 78.7,42.8 83.5,38 95.7,38 96.95,36.75 SW2.2@97.1,36.75 SW2.5@103.6,36.75 105.05,36.75 106.4,38.1 106.4,40 109.2,42.8 147.1,42.8 148.7,41.2 148.7,35.4 146.9,33.6 144.6,33.6 142.95,31.95 IC2.56@142.95,30
  PWR/SIG w0.254: v1(38.7,31.6) 38,32.3 38,37.1 43,42.1 v1(48.7,42.1)
DP_A_AUX_AC_N: C5.2 IC2.29 | length 28.7
  SIG w0.122: v1(133.7,19.1) 133.938,19.338 133.938,20.162 135.838,22.062 135.838,22.712 IC2.29@135.75,22.8 ; v1(149.4,19.2) 149.638,19.438 150.797,19.438 151.697,20.337 152.89,20.337 152.961,20.266 152.961,20.189 C5.2@153.15,20
  PWR/SIG w0.122: v1(133.7,19.1) 133.938,18.862 133.938,16.903 134.865,15.975 137.375,15.975 140.838,19.438 149.162,19.438 v1(149.4,19.2)
DP_A_AUX_AC_P: C4.2 IC2.30 | length 28.7
  SIG w0.122: v1(134.5,19.1) 134.262,19.338 134.262,20.028 136.162,21.928 136.162,22.712 IC2.30@136.25,22.8 ; v1(149.4,20) 149.638,19.762 150.663,19.762 151.563,20.662 152.89,20.662 152.961,20.734 152.961,20.811 C4.2@153.15,21
  PWR/SIG w0.122: v1(134.5,19.1) 134.262,18.862 134.262,17.038 135,16.3 137.241,16.3 140.703,19.762 146.2,19.762 147.612,19.762 ccw(c147.612,19.95) 147.8,19.95 147.8,19.996 cw(c147.988,19.996) 147.988,20.184 cw(c147.988,19.996) 148.176,19.996 148.176,19.95 ccw(c148.363,19.95) 148.363,19.762 148.8,19.762 149.162,19.762 v1(149.4,20)
DP_A_AUX_N: "DP A.17" C5.1 | length 7.8
  SIG w0.122: C5.1@154.15,20 154.339,20.189 154.339,20.266 154.41,20.338 154.611,20.338 156.338,18.611 156.338,15.556 156.149,15.367 156.149,15.289 156,15.14 156,14.08
DP_A_AUX_P: "DP A.15" C4.1 | length 8.3
  SIG w0.122: C4.1@154.15,21 154.339,20.811 154.339,20.734 154.41,20.662 154.745,20.662 156.662,18.745 156.662,15.556 156.851,15.367 156.851,15.289 157,15.14 157,14.08
DP_A_D0_N: "DP A.3" IC2.53 | length 34.4
  SIG w0.122: IC2.53@142.95,28.5 143.038,28.588 143.9,28.588 144.337,28.588 cw(c144.337,28.4) 144.524,28.4 144.524,28.349 ccw(c144.712,28.349) 144.712,28.162 ccw(c144.712,28.349) 144.9,28.349 144.9,28.4 cw(c145.088,28.4) 145.088,28.588 148.3,28.588 161.25,28.588 163.338,26.5 163.338,20.833 163.338,15.556 163.149,15.367 163.149,15.289 163,15.14 163,14.08
DP_A_D0_P: "DP A.1" IC2.54 | length 34.4
  SIG w0.122: IC2.54@142.95,29 143.038,28.912 161.385,28.912 163.662,26.635 163.662,20.968 163.662,15.556 163.851,15.367 163.851,15.289 164,15.14 164,14.08
DP_A_D1_N: "DP A.6" IC2.50 | length 34.4
  SIG w0.122: IC2.50@142.95,27 143.038,27.088 144,27.088 144.437,27.088 cw(c144.437,26.9) 144.624,26.9 144.624,26.845 ccw(c144.812,26.845) 144.812,26.657 ccw(c144.812,26.845) 145,26.845 145,26.9 cw(c145.188,26.9) 145.188,27.088 146,27.088 151.8,27.088 152.023,27.088 ccw(c152.023,27.6) 152.536,27.6 152.536,27.662 cw(c152.724,27.662) 152.724,27.85 cw(c152.724,27.662) 152.912,27.662 152.912,26.867 ccw(c153.425,26.867) 153.425,26.354 ccw(c153.425,26.867) 153.937,26.867 153.937,27.6 cw(c154.125,27.6) 154.125,27.788 cw(c154.125,27.6) 154.313,27.6 ccw(c154.826,27.6) 154.826,27.088 158.7,27.088 159.412,27.088 161.838,24.662 161.838,15.556 161.649,15.367 161.649,15.289 161.5,15.14 161.5,14.08
DP_A_D1_P: "DP A.4" IC2.51 | length 34.4
  SIG w0.122: IC2.51@142.95,27.5 143.038,27.412 151.8,27.412 152.023,27.412 ccw(c152.023,27.6) 152.211,27.6 152.211,27.662 cw(c152.724,27.662) 152.724,28.174 cw(c152.724,27.662) 153.237,27.662 153.237,26.867 ccw(c153.425,26.867) 153.425,26.679 ccw(c153.425,26.867) 153.612,26.867 153.612,27.6 cw(c154.125,27.6) 154.125,28.113 cw(c154.125,27.6) 154.638,27.6 ccw(c154.826,27.6) 154.826,27.412 158.7,27.412 159.547,27.412 162.162,24.797 162.162,15.556 162.351,15.367 162.351,15.289 162.5,15.14 162.5,14.08
DP_A_D2_N: "DP A.9" IC2.47 | length 34.4
  SIG w0.122: IC2.47@142.95,25.5 142.957,25.493 143.8,25.493 144.237,25.493 cw(c144.237,25.305) 144.424,25.305 144.424,25.227 ccw(c144.612,25.227) 144.612,25.039 ccw(c144.612,25.227) 144.8,25.227 144.8,25.305 cw(c144.988,25.305) 144.988,25.493 145.4,25.493 145.547,25.493 146.041,25 146.6,25 146.823,25 ccw(c146.823,25.513) 147.336,25.513 147.336,25.574 cw(c147.524,25.574) 147.524,25.762 cw(c147.524,25.574) 147.712,25.574 147.712,24.751 ccw(c148.224,24.751) 148.224,24.238 ccw(c148.225,24.751) 148.737,24.751 148.737,25.574 cw(c148.925,25.574) 148.925,25.762 cw(c148.925,25.574) 149.113,25.574 149.113,24.751 ccw(c149.626,24.751) 149.626,24.238 ccw(c149.626,24.751) 150.138,24.751 150.138,25.503 cw(c150.326,25.503) 150.326,25.691 cw(c150.326,25.503) 150.514,25.503 150.514,24.812 ccw(c151.027,24.812) 151.027,24.299 ccw(c151.027,24.812) 151.54,24.812 cw(c151.727,24.812) 151.727,25 155.6,25 157.5,25 160.338,22.162 160.338,15.556 160.149,15.367 160.149,15.289 160,15.14 160,14.08
DP_A_D2_P: "DP A.7" IC2.48 | length 34.4
  SIG w0.122: IC2.48@142.95,26 143.039,25.911 145.589,25.911 146.175,25.325 146.6,25.325 146.823,25.325 ccw(c146.823,25.513) 147.011,25.513 147.011,25.574 cw(c147.524,25.574) 147.524,26.087 cw(c147.524,25.574) 148.037,25.574 148.037,24.751 ccw(c148.224,24.751) 148.224,24.563 ccw(c148.225,24.751) 148.412,24.751 148.412,25.574 cw(c148.925,25.574) 148.925,26.087 cw(c148.925,25.574) 149.438,25.574 149.438,24.751 ccw(c149.626,24.751) 149.626,24.563 ccw(c149.626,24.751) 149.814,24.751 149.814,25.503 cw(c150.326,25.503) 150.326,26.016 cw(c150.326,25.503) 150.839,25.503 150.839,24.812 ccw(c151.027,24.812) 151.027,24.624 ccw(c151.027,24.812) 151.215,24.812 cw(c151.727,24.812) 151.727,25.325 155.6,25.325 157.635,25.325 160.662,22.297 160.662,15.556 160.851,15.367 160.851,15.289 161,15.14 161,14.08
DP_A_D3_N: "DP A.12" IC2.44 | length 34.4
  SIG w0.122: IC2.44@142.95,24 142.957,23.993 144.393,23.993 144.547,23.993 144.713,23.828 cw(c144.58,23.695) 144.713,23.562 144.657,23.507 ccw(c144.79,23.374) 144.657,23.241 ccw(c144.79,23.374) 144.923,23.241 144.978,23.297 cw(c145.111,23.164) 145.244,23.297 145.62,22.92 146.041,22.5 146.6,22.5 146.823,22.5 ccw(c146.823,23.013) 147.336,23.013 147.336,23.074 cw(c147.524,23.074) 147.524,23.262 cw(c147.524,23.074) 147.712,23.074 147.712,22.251 ccw(c148.224,22.251) 148.224,21.738 ccw(c148.225,22.251) 148.737,22.251 148.737,23.074 cw(c148.925,23.074) 148.925,23.262 cw(c148.925,23.074) 149.113,23.074 149.113,22.251 ccw(c149.626,22.251) 149.626,21.738 ccw(c149.626,22.251) 150.138,22.251 150.138,23.074 cw(c150.326,23.074) 150.326,23.262 cw(c150.326,23.074) 150.514,23.074 150.514,22.251 ccw(c151.027,22.251) 151.027,21.738 ccw(c151.027,22.251) 151.54,22.251 151.54,23.074 cw(c151.727,23.074) 151.727,23.262 cw(c151.727,23.074) 151.915,23.074 151.915,22.364 ccw(c152.428,22.364) 152.428,21.851 ccw(c152.428,22.364) 152.941,22.364 152.941,23.013 cw(c153.129,23.013) 153.129,23.201 cw(c153.129,23.013) 153.317,23.013 ccw(c153.829,23.013) 153.829,22.5 156,22.5 156.5,22 158.838,19.662 158.838,15.556 158.649,15.367 158.649,15.289 158.5,15.14 158.5,14.08
DP_A_D3_P: "DP A.10" IC2.45 | length 34.4
  SIG w0.122: IC2.45@142.95,24.5 143.039,24.411 144.589,24.411 144.727,24.273 146.175,22.825 146.6,22.825 146.823,22.825 ccw(c146.823,23.013) 147.011,23.013 147.011,23.074 cw(c147.524,23.074) 147.524,23.587 cw(c147.524,23.074) 148.037,23.074 148.037,22.251 ccw(c148.224,22.251) 148.224,22.063 ccw(c148.225,22.251) 148.412,22.251 148.412,23.074 cw(c148.925,23.074) 148.925,23.587 cw(c148.925,23.074) 149.438,23.074 149.438,22.251 ccw(c149.626,22.251) 149.626,22.063 ccw(c149.626,22.251) 149.814,22.251 149.814,23.074 cw(c150.326,23.074) 150.326,23.587 cw(c150.326,23.074) 150.839,23.074 150.839,22.251 ccw(c151.027,22.251) 151.027,22.063 ccw(c151.027,22.251) 151.215,22.251 151.215,23.074 cw(c151.727,23.074) 151.727,23.587 cw(c151.727,23.074) 152.24,23.074 152.24,22.364 ccw(c152.428,22.364) 152.428,22.176 ccw(c152.428,22.364) 152.616,22.364 152.616,23.013 cw(c153.129,23.013) 153.129,23.526 cw(c153.129,23.013) 153.641,23.013 ccw(c153.829,23.013) 153.829,22.825 156.135,22.825 156.5,22.459 159.162,19.797 159.162,15.556 159.351,15.367 159.351,15.289 159.5,15.14 159.5,14.08
DP_A_HPD: "DP A.18" IC2.16 R7.2 | length 43.4
  SIG w0.254: v1(132.7,30) 133.502,30 134.002,29.5 IC2.16@135.05,29.5 ; v1(153.5,16.4) 153.5,16.453 153.877,16.83 153.877,17.377 R7.2@154,17.5 154,17.45 155.5,15.95 155.5,14.08
  PWR/SIG w0.254: v1(132.7,30) 133.7,30 136.5,32.8 147.3,32.8 150.9,29.2 150.9,17.7 152.2,16.4 v1(153.5,16.4)
DP_B_AUX_AC_N: C9.2 IC2.25 | length 8.4
  SIG w0.122: C9.2@130.6,21 130.411,21.189 130.334,21.189 130.262,21.26 130.262,21.5 130.262,21.937 cw(c130.45,21.937) 130.45,22.124 130.517,22.124 ccw(c130.517,22.312) 130.705,22.312 ccw(c130.517,22.312) 130.517,22.5 130.45,22.5 cw(c130.45,22.688) 130.262,22.688 130.262,23.012 130.45,23.2 132.338,25.088 134.962,25.088 IC2.25@135.05,25
DP_B_AUX_AC_P: C8.2 IC2.24 | length 8.4
  SIG w0.122: C8.2@129.6,21 129.789,21.189 129.866,21.189 129.937,21.26 129.937,23.147 132.203,25.412 134.962,25.412 IC2.24@135.05,25.5
DP_B_AUX_N: "DP B.17" C9.1 | length 15.7
  SIG w0.122: C9.1@130.6,20 130.411,19.811 130.334,19.811 130.323,19.8 130.262,19.74 130.262,19.288 ccw(c130.45,19.288) 130.45,19.1 130.748,19.1 cw(c130.748,18.912) 130.936,18.912 cw(c130.748,18.912) 130.748,18.724 130.45,18.724 ccw(c130.45,18.537) 130.262,18.537 130.262,18.1 130.262,12.538 131.4,11.4 133.7,11.4 134.338,12.038 134.338,12.604 134.149,12.793 134.149,12.871 134,13.02 134,14.08
DP_B_AUX_P: "DP B.15" C8.1 | length 15.7
  SIG w0.122: C8.1@129.6,20 129.789,19.811 129.866,19.811 129.937,19.74 129.937,12.403 131.265,11.075 133.835,11.075 134.662,11.903 134.662,12.604 134.851,12.793 134.851,12.871 135,13.02 135,14.08
DP_B_D0_N: "DP B.3" IC2.40 | length 8.9
  SIG w0.122: 141,14.08 141.079,14.159 141.079,15.297 141.338,15.556 141.338,22.712 IC2.40@141.25,22.8
DP_B_D0_P: "DP B.1" IC2.41 | length 8.9
  SIG w0.122: IC2.41@141.75,22.8 141.662,22.712 141.662,15.556 141.921,15.297 141.921,14.159 142,14.08
DP_B_D1_N: "DP B.6" IC2.37 | length 8.9
  SIG w0.122: 139.5,14.08 139.579,14.159 139.579,15.297 139.838,15.556 139.838,22.712 IC2.37@139.75,22.8
DP_B_D1_P: "DP B.4" IC2.38 | length 8.9
  SIG w0.122: IC2.38@140.25,22.8 140.162,22.712 140.162,15.556 140.421,15.297 140.421,14.159 140.5,14.08
DP_B_D2_N: "DP B.9" IC2.34 | length 8.8
  SIG w0.122: 138.045,14.125 138.079,14.159 138.079,15.297 138.338,15.556 138.338,22.712 IC2.34@138.25,22.8
DP_B_D2_P: "DP B.7" IC2.35 | length 9
  SIG w0.122: IC2.35@138.75,22.8 138.662,22.712 138.662,15.556 138.921,15.297 138.921,14.159 139.05,14.03
DP_B_D3_N: "DP B.12" IC2.31 | length 8.9
  SIG w0.122: 136.5,14.08 136.579,14.159 136.579,15.297 136.838,15.556 136.838,22.712 IC2.31@136.75,22.8
DP_B_D3_P: "DP B.10" IC2.32 | length 9
  SIG w0.122: IC2.32@137.25,22.8 137.162,22.712 137.162,15.556 137.421,15.297 137.421,14.159 137.55,14.03
DP_B_HPD: "DP B.18" IC2.17 R11.2 | length 37.8
  SIG w0.254: v1(126.3,14.6) 126.3,17.577 126.9,18.177 126.9,21.8 124.8,23.9 124.8,28.2 126.6,30 128.8,30 129.6,29.2 v1(132.7,29.2) 132.753,29.2 132.953,29 IC2.17@135.05,29 ; v1(132.4,17.4) R11.2@133.5,17.4 133.5,14.08
  PWR/SIG w0.254: v1(126.3,14.6) 129.6,14.6 v1(132.4,17.4)
DP_CONFIG1: "DP S.13" R16.2 | length 23.6
  SIG w0.254: R16.2@111.7,36.7 111.7,21.3 114,19 114,14.08
DP_CONFIG2: "DP S.14" R17.2 | length 24.4
  SIG w0.254: R17.2@109.1,36.65 109.1,35.65 111.2,33.55 111.2,21.2 113.5,18.9 113.5,14.08
DP_MUX_AUX_SEL: IC2.1 R15.1 R18.2 | length 6.2
  SIG w0.254: IC2.1@142.25,30.7 142.25,33.15 143.5,34.4 R15.1@143.5,35.35 R18.2@144.5,35.35